# Altium PCB cando_pro_set.PcbDoc (part 2 of 3)
Units mm, origin at the board's own origin, x right, y up, seen from the top; angles counter-clockwise.
Board outline 91.6 x 86.4 mm, 2 copper layers (Top Layer, Bottom Layer); 320 components, 25 nets, 1260 pads, 588 vias.
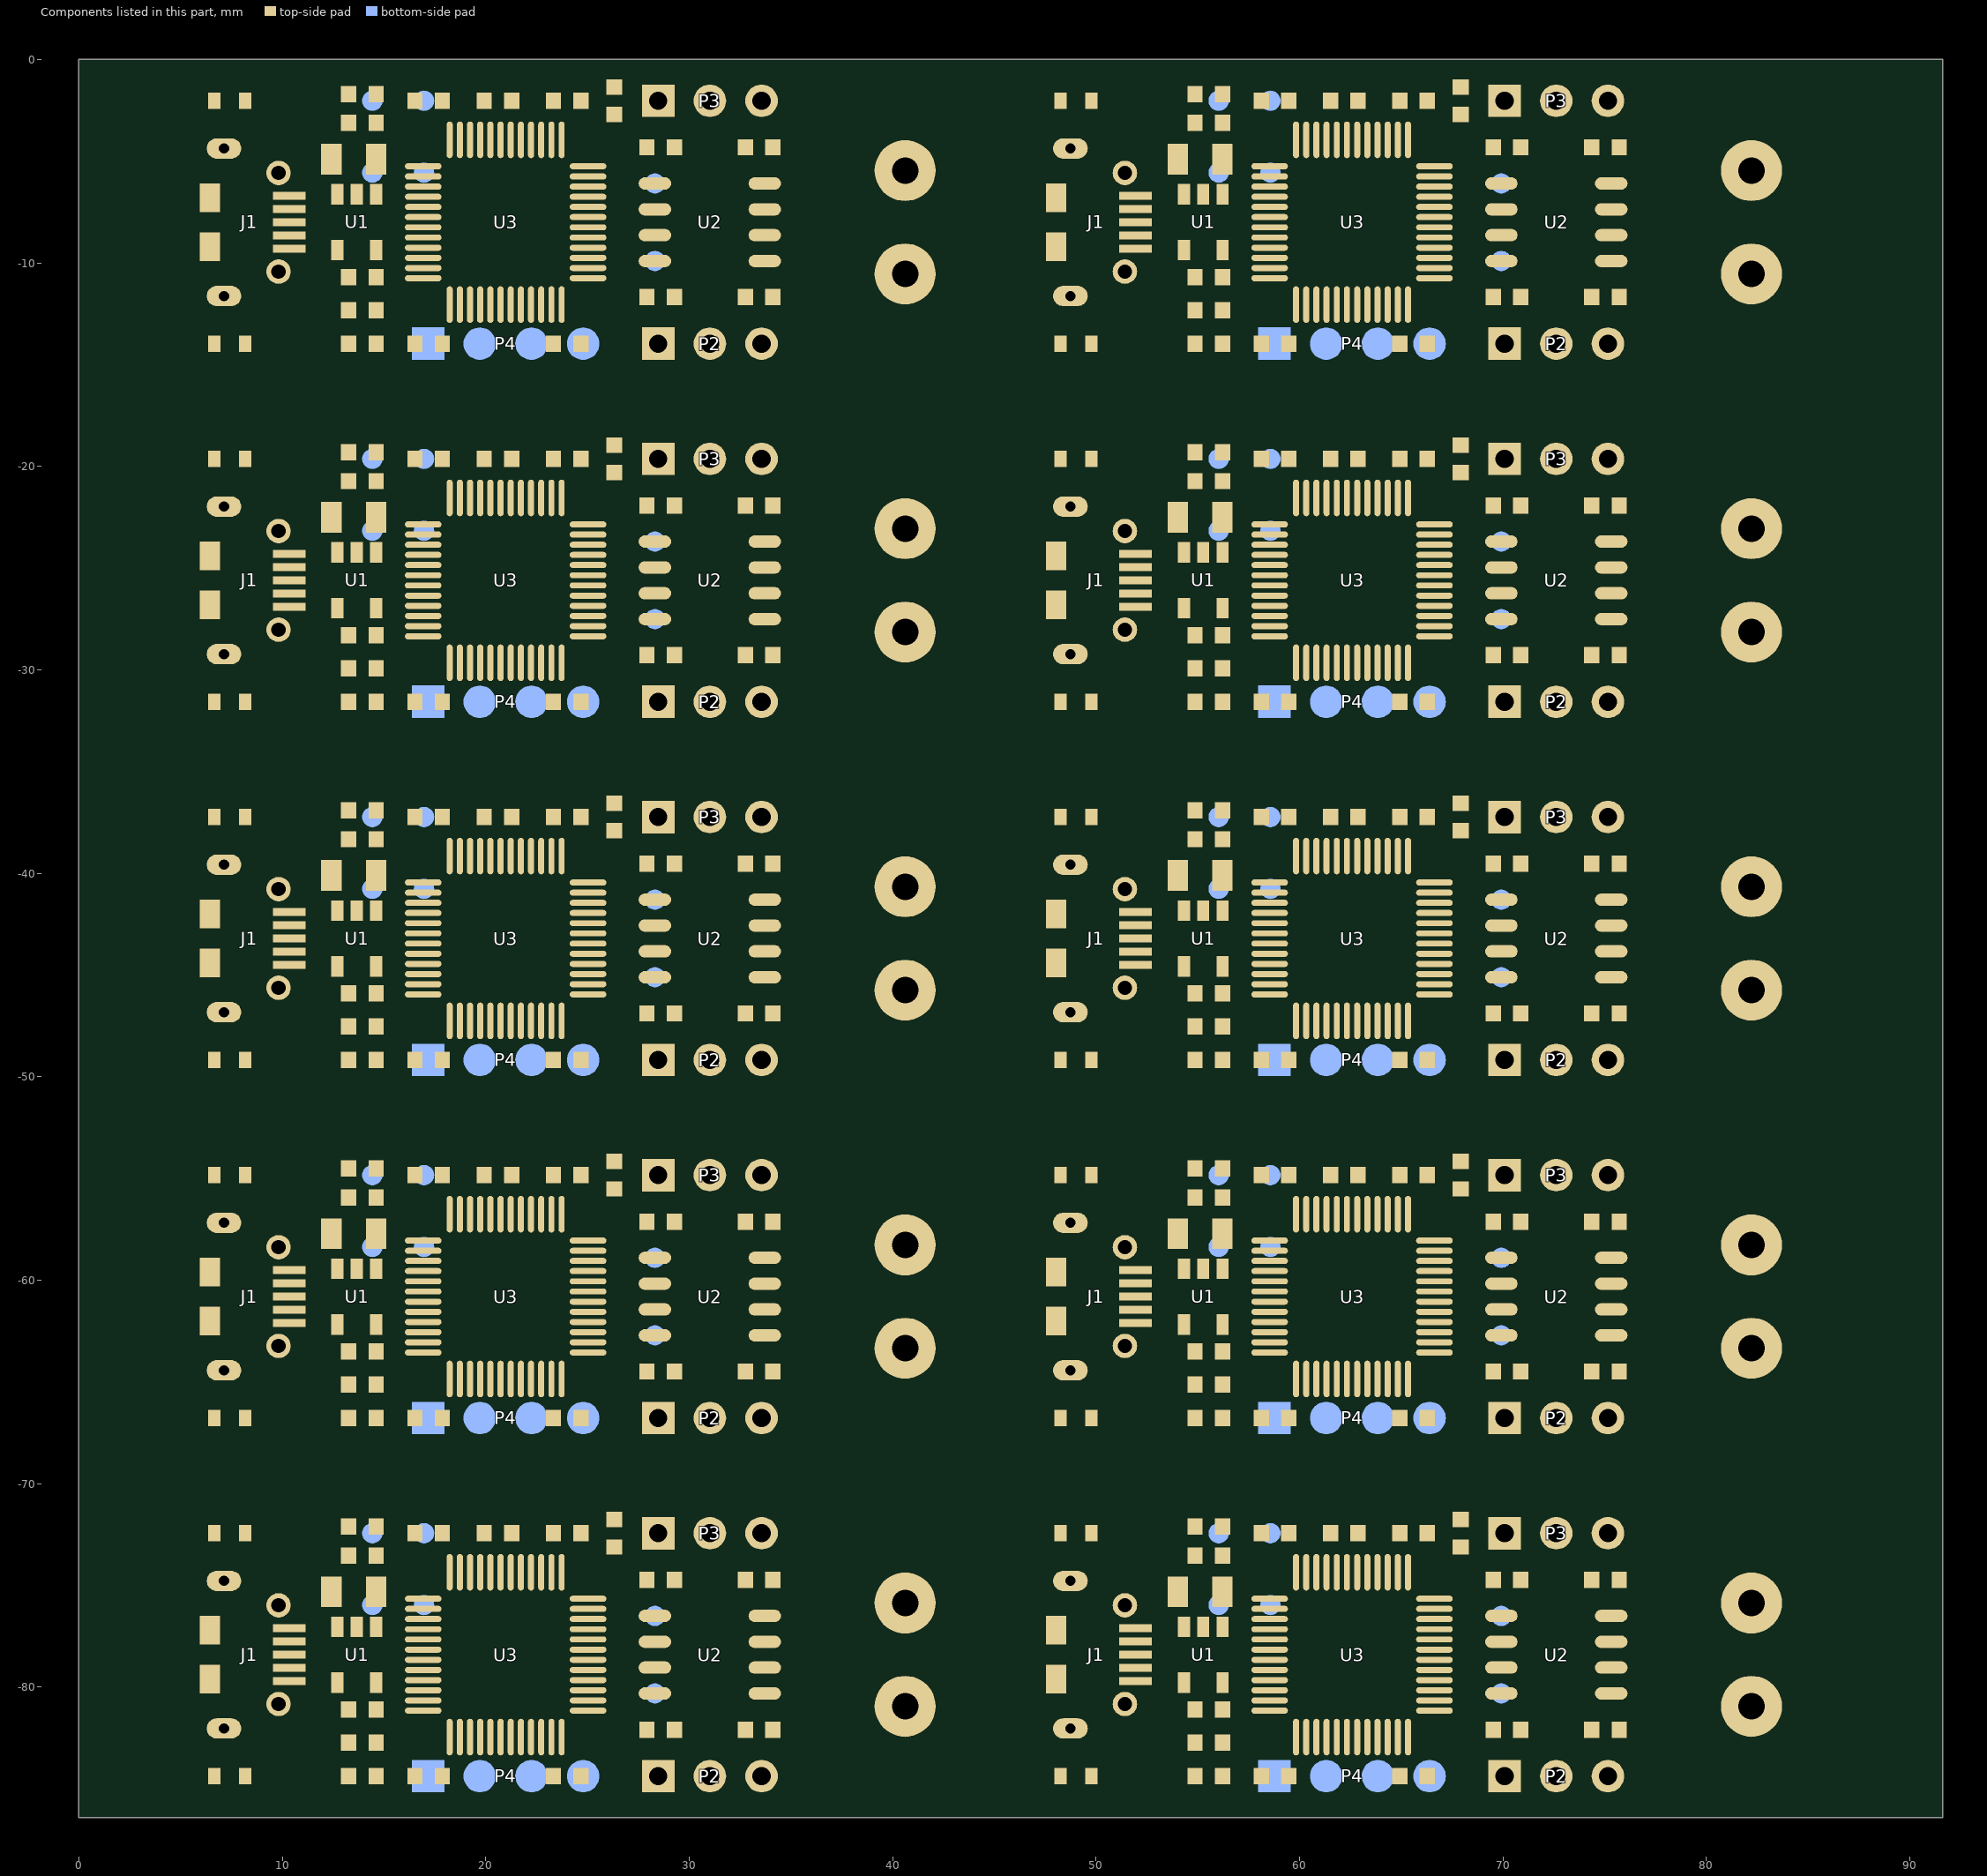
[diagram p2: the components of this part, seen from the top]

## Via types
v1: diameter 0.61, hole 0.305, Top Layer to Bottom Layer, tented both sides, 380 vias
v2: diameter 0.55, hole 0.55, Top Layer to Bottom Layer, 208 vias

## Nets (pads, with @x,y where several pads share a name; then routed paths per layer and width w, separated by ;. In a path a pad name is that pad's centre, name@x,y a point inside that pad or via, vN(x,y) a via of type N, cw(c..) or ccw(c..) an arc to the next point about the centre after c; other vN are vias at no path point) (continued)
copper on no net: | length 2947.5
  Top Layer w0.254: 6.653,-84.369 7.669,-85.385 8.811,-85.385 9.319,-84.877 10.587,-84.877 11.095,-85.385 18.919,-85.385 20.227,-84.078 20.227,-82.45 ; 6.653,-66.769 7.669,-67.785 8.811,-67.785 9.319,-67.277 10.587,-67.277 11.095,-67.785 18.919,-67.785 20.227,-66.478 20.227,-64.85 ; 6.653,-49.169 7.669,-50.185 8.811,-50.185 9.319,-49.677 10.587,-49.677 11.095,-50.185 18.919,-50.185 20.227,-48.878 20.227,-47.25 ; 6.653,-31.569 7.669,-32.585 8.811,-32.585 9.319,-32.077 10.587,-32.077 11.095,-32.585 18.919,-32.585 20.227,-31.278 20.227,-29.65 ; 6.653,-13.969 7.669,-14.985 8.811,-14.985 9.319,-14.477 10.587,-14.477 11.095,-14.985 18.919,-14.985 20.227,-13.678 20.227,-12.05 ; 8.173,-84.369 13.261,-84.369 ; 8.173,-72.431 12.931,-72.431 13.261,-72.101 ; 8.173,-66.769 13.261,-66.769 ; 8.173,-54.831 12.931,-54.831 13.261,-54.501 ; 8.173,-49.169 13.261,-49.169 ; 8.173,-37.231 12.931,-37.231 13.261,-36.901 ; 8.173,-31.569 13.261,-31.569 ; 8.173,-19.631 12.931,-19.631 13.261,-19.301 ; 8.173,-13.969 13.261,-13.969 ; 8.173,-2.031 12.931,-2.031 13.261,-1.701 ; 10.334,-78.4 12.369,-78.4 v1(12.645,-78.676) ; 10.334,-77.75 v1(11.719,-77.75) ; 10.334,-60.8 12.369,-60.8 v1(12.645,-61.076) ; 10.334,-60.15 v1(11.719,-60.15) ; 10.334,-43.2 12.369,-43.2 v1(12.645,-43.476) ; 10.334,-42.55 v1(11.719,-42.55) ; 10.334,-25.6 12.369,-25.6 v1(12.645,-25.876) ; 10.334,-24.95 v1(11.719,-24.95) ; 10.334,-8 12.369,-8 v1(12.645,-8.276) ; 10.334,-7.35 v1(11.719,-7.35) ; 12.711,-79.775 12.163,-80.324 12.163,-81.632 13.261,-82.731 ; 12.711,-62.175 12.163,-62.724 12.163,-64.032 13.261,-65.131 ; 12.711,-44.575 12.163,-45.124 12.163,-46.432 13.261,-47.531 ; 12.711,-26.975 12.163,-27.524 12.163,-28.832 13.261,-29.931 ; 12.711,-9.375 12.163,-9.924 12.163,-11.232 13.261,-12.331 ; 14.611,-84.369 16.517,-84.369 ; 14.611,-72.101 14.881,-72.101 16.024,-73.244 17.054,-73.244 17.867,-72.431 18.719,-72.431 19.727,-73.438 19.727,-74.35 19.727,-76.33 v1(22.431,-79.035) ; 14.611,-66.769 16.517,-66.769 ; 14.611,-54.501 14.881,-54.501 16.024,-55.644 17.054,-55.644 17.867,-54.831 18.719,-54.831 19.727,-55.838 19.727,-56.75 19.727,-58.73 v1(22.431,-61.435) ; 14.611,-49.169 16.517,-49.169 ; 14.611,-36.901 14.881,-36.901 16.024,-38.044 17.054,-38.044 17.867,-37.231 18.719,-37.231 19.727,-38.238 19.727,-39.15 19.727,-41.13 v1(22.431,-43.835) ; 14.611,-31.569 16.517,-31.569 ; 14.611,-19.301 14.881,-19.301 16.024,-20.444 17.054,-20.444 17.867,-19.631 18.719,-19.631 19.727,-20.638 19.727,-21.55 19.727,-23.53 v1(22.431,-26.235) ; 14.611,-13.969 16.517,-13.969 ; 14.611,-1.701 14.881,-1.701 16.024,-2.844 17.054,-2.844 17.867,-2.031 18.719,-2.031 19.727,-3.038 19.727,-3.95 19.727,-5.93 v1(22.431,-8.635) ; v1(16.517,-82.998) 16.517,-81.56 16.927,-81.15 ; v1(16.517,-65.398) 16.517,-63.96 16.927,-63.55 ; v1(16.517,-47.798) 16.517,-46.36 16.927,-45.95 ; v1(16.517,-30.198) 16.517,-28.76 16.927,-28.35 ; v1(16.517,-12.598) 16.517,-11.16 16.927,-10.75 ; v1(16.582,-73.904) 16.927,-74.248 16.927,-75.65 ; v1(16.582,-56.304) 16.927,-56.648 16.927,-58.05 ; v1(16.582,-38.704) 16.927,-39.048 16.927,-40.45 ; v1(16.582,-21.104) 16.927,-21.448 16.927,-22.85 ; v1(16.582,-3.504) 16.927,-3.848 16.927,-5.25 ; 16.927,-80.65 18.625,-80.65 v1(18.716,-80.559) ; 16.927,-76.15 17.924,-76.15 v1(18.727,-76.952) ; 16.927,-63.05 18.625,-63.05 v1(18.716,-62.959) ; 16.927,-58.55 17.924,-58.55 v1(18.727,-59.352) ; 16.927,-45.45 18.625,-45.45 v1(18.716,-45.359) ; 16.927,-40.95 17.924,-40.95 v1(18.727,-41.752) ; 16.927,-27.85 18.625,-27.85 v1(18.716,-27.759) ; 16.927,-23.35 17.924,-23.35 v1(18.727,-24.152) ; 16.927,-10.25 18.625,-10.25 v1(18.716,-10.159) ; 16.927,-5.75 17.924,-5.75 v1(18.727,-6.552) ; v1(17.243,-82.032) v1@17.243,-82.007 ; v1(17.243,-64.432) v1@17.243,-64.407 ; v1(17.243,-46.832) v1@17.243,-46.807 ; v1(17.243,-29.232) v1@17.243,-29.207 ; v1(17.243,-11.632) v1@17.243,-11.607 ; v1(17.548,-73.904) 17.781,-73.904 18.227,-74.35 ; v1(17.548,-56.304) 17.781,-56.304 18.227,-56.75 ; v1(17.548,-38.704) 17.781,-38.704 18.227,-39.15 ; v1(17.548,-21.104) 17.781,-21.104 18.227,-21.55 ; v1(17.548,-3.504) 17.781,-3.504 18.227,-3.95 ; v1(18.727,-75.962) 18.727,-74.35 ; v1(18.727,-58.362) 18.727,-56.75 ; v1(18.727,-40.762) 18.727,-39.15 ; v1(18.727,-23.162) 18.727,-21.55 ; v1(18.727,-5.562) 18.727,-3.95 ; v1(18.818,-78.679) 19.979,-78.679 19.983,-78.676 22.227,-80.92 22.227,-82.45 ; v1(18.818,-61.079) 19.979,-61.079 19.983,-61.076 22.227,-63.32 22.227,-64.85 ; v1(18.818,-43.479) 19.979,-43.479 19.983,-43.476 22.227,-45.72 22.227,-47.25 ; v1(18.818,-25.879) 19.979,-25.879 19.983,-25.876 22.227,-28.12 22.227,-29.65 ; v1(18.818,-8.279) 19.979,-8.279 19.983,-8.276 22.227,-10.52 22.227,-12.05 ; v1(19.681,-79.441) 21.727,-81.487 21.727,-82.45 ; v1(19.681,-61.841) 21.727,-63.887 21.727,-64.85 ; v1(19.681,-44.241) 21.727,-46.287 21.727,-47.25 ; v1(19.681,-26.641) 21.727,-28.687 21.727,-29.65 ; v1(19.681,-9.041) 21.727,-11.087 21.727,-12.05 ; 19.921,-72.431 20.227,-72.737 20.227,-74.35 20.227,-75.593 v1(21.637,-77.003) ; 19.921,-54.831 20.227,-55.137 20.227,-56.75 20.227,-57.993 v1(21.637,-59.403) ; 19.921,-37.231 20.227,-37.537 20.227,-39.15 20.227,-40.393 v1(21.637,-41.803) ; 19.921,-19.631 20.227,-19.937 20.227,-21.55 20.227,-22.793 v1(21.637,-24.203) ; 19.921,-2.031 20.227,-2.337 20.227,-3.95 20.227,-5.193 v1(21.637,-6.603) ; 20.727,-74.35 20.727,-72.975 21.271,-72.431 ; 20.727,-56.75 20.727,-55.375 21.271,-54.831 ; 20.727,-39.15 20.727,-37.775 21.271,-37.231 ; 20.727,-21.55 20.727,-20.175 21.271,-19.631 ; 20.727,-3.95 20.727,-2.575 21.271,-2.031 ; 22.727,-82.45 22.727,-80.761 v1(22.907,-80.581) ; 22.727,-64.85 22.727,-63.161 v1(22.907,-62.981) ; 22.727,-47.25 22.727,-45.561 v1(22.907,-45.381) ; 22.727,-29.65 22.727,-27.961 v1(22.907,-27.781) ; 22.727,-12.05 22.727,-10.361 v1(22.907,-10.181) ; v1(23.136,-77.892) v1(23.136,-76.556) 23.542,-76.15 25.027,-76.15 ; v1(23.136,-60.292) v1(23.136,-58.956) 23.542,-58.55 25.027,-58.55 ; v1(23.136,-42.692) v1(23.136,-41.356) 23.542,-40.95 25.027,-40.95 ; v1(23.136,-25.092) v1(23.136,-23.756) 23.542,-23.35 25.027,-23.35 ; v1(23.136,-7.492) v1(23.136,-6.156) 23.542,-5.75 25.027,-5.75 ; 23.227,-82.45 23.227,-84.271 23.325,-84.369 ; 23.227,-64.85 23.227,-66.671 23.325,-66.769 ; 23.227,-47.25 23.227,-49.071 23.325,-49.169 ; 23.227,-29.65 23.227,-31.471 23.325,-31.569 ; 23.227,-12.05 23.227,-13.871 23.325,-13.969 ; 23.325,-72.431 23.727,-72.833 23.727,-74.35 25.027,-75.65 22.965,-75.65 22.431,-76.183 v1(22.431,-79.035) ; 23.325,-54.831 23.727,-55.233 23.727,-56.75 25.027,-58.05 22.965,-58.05 22.431,-58.583 v1(22.431,-61.435) ; 23.325,-37.231 23.727,-37.633 23.727,-39.15 25.027,-40.45 22.965,-40.45 22.431,-40.983 v1(22.431,-43.835) ; 23.325,-19.631 23.727,-20.033 23.727,-21.55 25.027,-22.85 22.965,-22.85 22.431,-23.383 v1(22.431,-26.235) ; 23.325,-2.031 23.727,-2.433 23.727,-3.95 25.027,-5.25 22.965,-5.25 22.431,-5.783 v1(22.431,-8.635) ; 24.675,-84.369 23.727,-83.421 23.727,-82.45 23.727,-80.33 v1(22.431,-79.035) ; 24.675,-66.769 23.727,-65.821 23.727,-64.85 23.727,-62.73 v1(22.431,-61.435) ; 24.675,-49.169 23.727,-48.221 23.727,-47.25 23.727,-45.13 v1(22.431,-43.835) ; 24.675,-31.569 23.727,-30.621 23.727,-29.65 23.727,-27.53 v1(22.431,-26.235) ; 24.675,-13.969 23.727,-13.021 23.727,-12.05 23.727,-9.93 v1(22.431,-8.635) ; 25.027,-81.15 26.087,-82.21 v1(26.107,-82.21) ; 25.027,-80.65 26.325,-80.65 26.742,-81.067 30.273,-81.067 30.69,-80.65 30.69,-78.77 32.965,-76.495 33.715,-76.495 32.758,-75.538 32.758,-74.717 ; 25.027,-77.65 26.323,-77.65 v1(26.514,-77.841) ; 25.027,-77.15 26.889,-77.15 27.149,-77.409 27.149,-79.717 27.736,-80.305 28.315,-80.305 v1(29.816,-80.305) ; 25.027,-76.65 28.16,-76.65 28.315,-76.495 v1(29.816,-76.495) ; 25.027,-63.55 26.087,-64.61 v1(26.107,-64.61) ; 25.027,-63.05 26.325,-63.05 26.742,-63.467 30.273,-63.467 30.69,-63.05 30.69,-61.17 32.965,-58.895 33.715,-58.895 32.758,-57.938 32.758,-57.117 ; 25.027,-60.05 26.323,-60.05 v1(26.514,-60.241) ; 25.027,-59.55 26.889,-59.55 27.149,-59.809 27.149,-62.117 27.736,-62.705 28.315,-62.705 v1(29.816,-62.705) ; 25.027,-59.05 28.16,-59.05 28.315,-58.895 v1(29.816,-58.895) ; 25.027,-45.95 26.087,-47.01 v1(26.107,-47.01) ; 25.027,-45.45 26.325,-45.45 26.742,-45.867 30.273,-45.867 30.69,-45.45 30.69,-43.57 32.965,-41.295 33.715,-41.295 32.758,-40.338 32.758,-39.517 ; 25.027,-42.45 26.323,-42.45 v1(26.514,-42.641) ; 25.027,-41.95 26.889,-41.95 27.149,-42.209 27.149,-44.517 27.736,-45.105 28.315,-45.105 v1(29.816,-45.105) ; 25.027,-41.45 28.16,-41.45 28.315,-41.295 v1(29.816,-41.295) ; 25.027,-28.35 26.087,-29.41 v1(26.107,-29.41) ; 25.027,-27.85 26.325,-27.85 26.742,-28.267 30.273,-28.267 30.69,-27.85 30.69,-25.97 32.965,-23.695 33.715,-23.695 32.758,-22.738 32.758,-21.917 ; 25.027,-24.85 26.323,-24.85 v1(26.514,-25.041) ; 25.027,-24.35 26.889,-24.35 27.149,-24.609 27.149,-26.917 27.736,-27.505 28.315,-27.505 v1(29.816,-27.505) ; 25.027,-23.85 28.16,-23.85 28.315,-23.695 v1(29.816,-23.695) ; 25.027,-10.75 26.087,-11.81 v1(26.107,-11.81) ; 25.027,-10.25 26.325,-10.25 26.742,-10.667 30.273,-10.667 30.69,-10.25 30.69,-8.37 32.965,-6.095 33.715,-6.095 32.758,-5.138 32.758,-4.317 ; 25.027,-7.25 26.323,-7.25 v1(26.514,-7.441) ; 25.027,-6.75 26.889,-6.75 27.149,-7.009 27.149,-9.317 27.736,-9.905 28.315,-9.905 v1(29.816,-9.905) ; 25.027,-6.25 28.16,-6.25 28.315,-6.095 v1(29.816,-6.095) ; 26.316,-73.106 26.514,-73.304 v1(26.514,-75.86) ; 26.316,-71.756 26.889,-71.183 29.766,-71.183 31.015,-72.431 ; 26.316,-55.506 26.514,-55.704 v1(26.514,-58.26) ; 26.316,-54.156 26.889,-53.583 29.766,-53.583 31.015,-54.831 ; 26.316,-37.906 26.514,-38.104 v1(26.514,-40.66) ; 26.316,-36.556 26.889,-35.983 29.766,-35.983 31.015,-37.231 ; 26.316,-20.306 26.514,-20.504 v1(26.514,-23.06) ; 26.316,-18.956 26.889,-18.383 29.766,-18.383 31.015,-19.631 ; 26.316,-2.706 26.514,-2.904 v1(26.514,-5.46) ; 26.316,-1.356 26.889,-0.783 29.766,-0.783 31.015,-2.031 ; 29.272,-82.083 30.806,-82.083 32.584,-80.305 33.245,-80.305 ; 29.272,-64.483 30.806,-64.483 32.584,-62.705 33.245,-62.705 ; 29.272,-46.883 30.806,-46.883 32.584,-45.105 33.245,-45.105 ; 29.272,-29.283 30.806,-29.283 32.584,-27.505 33.245,-27.505 ; 29.272,-11.683 30.806,-11.683 32.584,-9.905 33.245,-9.905 ; 33.555,-72.431 34.108,-72.984 34.108,-74.717 34.108,-75.097 34.997,-75.987 34.997,-76.876 34.743,-77.13 32.965,-77.13 31.975,-78.121 v1(31.975,-79.035) 33.245,-80.305 ; 33.555,-54.831 34.108,-55.384 34.108,-57.117 34.108,-57.497 34.997,-58.387 34.997,-59.276 34.743,-59.53 32.965,-59.53 31.975,-60.521 v1(31.975,-61.435) 33.245,-62.705 ; 33.555,-37.231 34.108,-37.784 34.108,-39.517 34.108,-39.897 34.997,-40.787 34.997,-41.676 34.743,-41.93 32.965,-41.93 31.975,-42.921 v1(31.975,-43.835) 33.245,-45.105 ; 33.555,-19.631 34.108,-20.184 34.108,-21.917 34.108,-22.297 34.997,-23.187 34.997,-24.076 34.743,-24.33 32.965,-24.33 31.975,-25.321 v1(31.975,-26.235) 33.245,-27.505 ; 33.555,-2.031 34.108,-2.584 34.108,-4.317 34.108,-4.697 34.997,-5.587 34.997,-6.476 34.743,-6.73 32.965,-6.73 31.975,-7.721 v1(31.975,-8.635) 33.245,-9.905 ; 33.715,-80.305 33.245,-80.305 ; 33.715,-62.705 33.245,-62.705 ; 33.715,-45.105 33.245,-45.105 ; 33.715,-27.505 33.245,-27.505 ; 33.715,-9.905 33.245,-9.905 ; 48.253,-84.369 49.269,-85.385 50.411,-85.385 50.919,-84.877 52.187,-84.877 52.695,-85.385 60.519,-85.385 61.827,-84.078 61.827,-82.45 ; 48.253,-66.769 49.269,-67.785 50.411,-67.785 50.919,-67.277 52.187,-67.277 52.695,-67.785 60.519,-67.785 61.827,-66.478 61.827,-64.85 ; 48.253,-49.169 49.269,-50.185 50.411,-50.185 50.919,-49.677 52.187,-49.677 52.695,-50.185 60.519,-50.185 61.827,-48.878 61.827,-47.25 ; 48.253,-31.569 49.269,-32.585 50.411,-32.585 50.919,-32.077 52.187,-32.077 52.695,-32.585 60.519,-32.585 61.827,-31.278 61.827,-29.65 ; 48.253,-13.969 49.269,-14.985 50.411,-14.985 50.919,-14.477 52.187,-14.477 52.695,-14.985 60.519,-14.985 61.827,-13.678 61.827,-12.05 ; 49.773,-84.369 54.861,-84.369 ; 49.773,-72.431 54.531,-72.431 54.861,-72.101 ; 49.773,-66.769 54.861,-66.769 ; 49.773,-54.831 54.531,-54.831 54.861,-54.501 ; 49.773,-49.169 54.861,-49.169 ; 49.773,-37.231 54.531,-37.231 54.861,-36.901 ; 49.773,-31.569 54.861,-31.569 ; 49.773,-19.631 54.531,-19.631 54.861,-19.301 ; 49.773,-13.969 54.861,-13.969 ; 49.773,-2.031 54.531,-2.031 54.861,-1.701 ; 51.934,-78.4 53.969,-78.4 v1(54.245,-78.676) ; 51.934,-77.75 v1(53.319,-77.75) ; 51.934,-60.8 53.969,-60.8 v1(54.245,-61.076) ; 51.934,-60.15 v1(53.319,-60.15) ; 51.934,-43.2 53.969,-43.2 v1(54.245,-43.476) ; 51.934,-42.55 v1(53.319,-42.55) ; 51.934,-25.6 53.969,-25.6 v1(54.245,-25.876) ; 51.934,-24.95 v1(53.319,-24.95) ; 51.934,-8 53.969,-8 v1(54.245,-8.276) ; 51.934,-7.35 v1(53.319,-7.35) ; 54.311,-79.775 53.763,-80.324 53.763,-81.632 54.861,-82.731 ; 54.311,-62.175 53.763,-62.724 53.763,-64.032 54.861,-65.131 ; 54.311,-44.575 53.763,-45.124 53.763,-46.432 54.861,-47.531 ; 54.311,-26.975 53.763,-27.524 53.763,-28.832 54.861,-29.931 ; 54.311,-9.375 53.763,-9.924 53.763,-11.232 54.861,-12.331 ; 56.211,-84.369 58.117,-84.369 ; 56.211,-72.101 56.481,-72.101 57.624,-73.244 58.654,-73.244 59.467,-72.431 60.319,-72.431 61.327,-73.438 61.327,-74.35 61.327,-76.33 v1(64.031,-79.035) ; 56.211,-66.769 58.117,-66.769 ; 56.211,-54.501 56.481,-54.501 57.624,-55.644 58.654,-55.644 59.467,-54.831 60.319,-54.831 61.327,-55.838 61.327,-56.75 61.327,-58.73 v1(64.031,-61.435) ; 56.211,-49.169 58.117,-49.169 ; 56.211,-36.901 56.481,-36.901 57.624,-38.044 58.654,-38.044 59.467,-37.231 60.319,-37.231 61.327,-38.238 61.327,-39.15 61.327,-41.13 v1(64.031,-43.835) ; 56.211,-31.569 58.117,-31.569 ; 56.211,-19.301 56.481,-19.301 57.624,-20.444 58.654,-20.444 59.467,-19.631 60.319,-19.631 61.327,-20.638 61.327,-21.55 61.327,-23.53 v1(64.031,-26.235) ; 56.211,-13.969 58.117,-13.969 ; 56.211,-1.701 56.481,-1.701 57.624,-2.844 58.654,-2.844 59.467,-2.031 60.319,-2.031 61.327,-3.038 61.327,-3.95 61.327,-5.93 v1(64.031,-8.635) ; v1(58.117,-82.998) 58.117,-81.56 58.527,-81.15 ; v1(58.117,-65.398) 58.117,-63.96 58.527,-63.55 ; v1(58.117,-47.798) 58.117,-46.36 58.527,-45.95 ; v1(58.117,-30.198) 58.117,-28.76 58.527,-28.35 ; v1(58.117,-12.598) 58.117,-11.16 58.527,-10.75 ; v1(58.182,-73.904) 58.527,-74.248 58.527,-75.65 ; v1(58.182,-56.304) 58.527,-56.648 58.527,-58.05 ; v1(58.182,-38.704) 58.527,-39.048 58.527,-40.45 ; v1(58.182,-21.104) 58.527,-21.448 58.527,-22.85 ; v1(58.182,-3.504) 58.527,-3.848 58.527,-5.25 ; 58.527,-80.65 60.225,-80.65 v1(60.316,-80.559) ; 58.527,-76.15 59.524,-76.15 v1(60.327,-76.952) ; 58.527,-63.05 60.225,-63.05 v1(60.316,-62.959) ; 58.527,-58.55 59.524,-58.55 v1(60.327,-59.352) ; 58.527,-45.45 60.225,-45.45 v1(60.316,-45.359) ; 58.527,-40.95 59.524,-40.95 v1(60.327,-41.752) ; 58.527,-27.85 60.225,-27.85 v1(60.316,-27.759) ; 58.527,-23.35 59.524,-23.35 v1(60.327,-24.152) ; 58.527,-10.25 60.225,-10.25 v1(60.316,-10.159) ; 58.527,-5.75 59.524,-5.75 v1(60.327,-6.552) ; v1(58.843,-82.032) v1@58.843,-82.007 ; v1(58.843,-64.432) v1@58.843,-64.407 ; v1(58.843,-46.832) v1@58.843,-46.807 ; v1(58.843,-29.232) v1@58.843,-29.207 ; v1(58.843,-11.632) v1@58.843,-11.607 ; v1(59.148,-73.904) 59.381,-73.904 59.827,-74.35 ; v1(59.148,-56.304) 59.381,-56.304 59.827,-56.75 ; v1(59.148,-38.704) 59.381,-38.704 59.827,-39.15 ; v1(59.148,-21.104) 59.381,-21.104 59.827,-21.55 ; v1(59.148,-3.504) 59.381,-3.504 59.827,-3.95 ; v1(60.327,-75.962) 60.327,-74.35 ; v1(60.327,-58.362) 60.327,-56.75 ; v1(60.327,-40.762) 60.327,-39.15 ; v1(60.327,-23.162) 60.327,-21.55 ; v1(60.327,-5.562) 60.327,-3.95 ; v1(60.418,-78.679) 61.579,-78.679 61.583,-78.676 63.827,-80.92 63.827,-82.45 ; v1(60.418,-61.079) 61.579,-61.079 61.583,-61.076 63.827,-63.32 63.827,-64.85 ; v1(60.418,-43.479) 61.579,-43.479 61.583,-43.476 63.827,-45.72 63.827,-47.25 ; v1(60.418,-25.879) 61.579,-25.879 61.583,-25.876 63.827,-28.12 63.827,-29.65 ; v1(60.418,-8.279) 61.579,-8.279 61.583,-8.276 63.827,-10.52 63.827,-12.05 ; v1(61.281,-79.441) 63.327,-81.487 63.327,-82.45 ; v1(61.281,-61.841) 63.327,-63.887 63.327,-64.85 ; v1(61.281,-44.241) 63.327,-46.287 63.327,-47.25 ; v1(61.281,-26.641) 63.327,-28.687 63.327,-29.65 ; v1(61.281,-9.041) 63.327,-11.087 63.327,-12.05 ; 61.521,-72.431 61.827,-72.737 61.827,-74.35 61.827,-75.593 v1(63.237,-77.003) ; 61.521,-54.831 61.827,-55.137 61.827,-56.75 61.827,-57.993 v1(63.237,-59.403) ; 61.521,-37.231 61.827,-37.537 61.827,-39.15 61.827,-40.393 v1(63.237,-41.803) ; 61.521,-19.631 61.827,-19.937 61.827,-21.55 61.827,-22.793 v1(63.237,-24.203) ; 61.521,-2.031 61.827,-2.337 61.827,-3.95 61.827,-5.193 v1(63.237,-6.603) ; 62.327,-74.35 62.327,-72.975 62.871,-72.431 ; 62.327,-56.75 62.327,-55.375 62.871,-54.831 ; 62.327,-39.15 62.327,-37.775 62.871,-37.231 ; 62.327,-21.55 62.327,-20.175 62.871,-19.631 ; 62.327,-3.95 62.327,-2.575 62.871,-2.031 ; 64.327,-82.45 64.327,-80.761 v1(64.507,-80.581) ; 64.327,-64.85 64.327,-63.161 v1(64.507,-62.981) ; 64.327,-47.25 64.327,-45.561 v1(64.507,-45.381) ; 64.327,-29.65 64.327,-27.961 v1(64.507,-27.781) ; 64.327,-12.05 64.327,-10.361 v1(64.507,-10.181) ; v1(64.736,-77.892) v1(64.736,-76.556) 65.142,-76.15 66.627,-76.15 ; v1(64.736,-60.292) v1(64.736,-58.956) 65.142,-58.55 66.627,-58.55 ; v1(64.736,-42.692) v1(64.736,-41.356) 65.142,-40.95 66.627,-40.95 ; v1(64.736,-25.092) v1(64.736,-23.756) 65.142,-23.35 66.627,-23.35 ; v1(64.736,-7.492) v1(64.736,-6.156) 65.142,-5.75 66.627,-5.75 ; 64.827,-82.45 64.827,-84.271 64.925,-84.369 ; 64.827,-64.85 64.827,-66.671 64.925,-66.769 ; 64.827,-47.25 64.827,-49.071 64.925,-49.169 ; 64.827,-29.65 64.827,-31.471 64.925,-31.569 ; 64.827,-12.05 64.827,-13.871 64.925,-13.969 ; 64.925,-72.431 65.327,-72.833 65.327,-74.35 66.627,-75.65 64.565,-75.65 64.031,-76.183 v1(64.031,-79.035) ; 64.925,-54.831 65.327,-55.233 65.327,-56.75 66.627,-58.05 64.565,-58.05 64.031,-58.583 v1(64.031,-61.435) ; 64.925,-37.231 65.327,-37.633 65.327,-39.15 66.627,-40.45 64.565,-40.45 64.031,-40.983 v1(64.031,-43.835) ; 64.925,-19.631 65.327,-20.033 65.327,-21.55 66.627,-22.85 64.565,-22.85 64.031,-23.383 v1(64.031,-26.235) ; 64.925,-2.031 65.327,-2.433 65.327,-3.95 66.627,-5.25 64.565,-5.25 64.031,-5.783 v1(64.031,-8.635) ; 66.275,-84.369 65.327,-83.421 65.327,-82.45 65.327,-80.33 v1(64.031,-79.035) ; 66.275,-66.769 65.327,-65.821 65.327,-64.85 65.327,-62.73 v1(64.031,-61.435) ; 66.275,-49.169 65.327,-48.221 65.327,-47.25 65.327,-45.13 v1(64.031,-43.835) ; 66.275,-31.569 65.327,-30.621 65.327,-29.65 65.327,-27.53 v1(64.031,-26.235) ; 66.275,-13.969 65.327,-13.021 65.327,-12.05 65.327,-9.93 v1(64.031,-8.635) ; 66.627,-81.15 67.687,-82.21 v1(67.707,-82.21) ; 66.627,-80.65 67.925,-80.65 68.342,-81.067 71.873,-81.067 72.29,-80.65 72.29,-78.77 74.565,-76.495 75.315,-76.495 74.358,-75.538 74.358,-74.717 ; 66.627,-77.65 67.923,-77.65 v1(68.114,-77.841) ; 66.627,-77.15 68.489,-77.15 68.749,-77.409 68.749,-79.717 69.336,-80.305 69.915,-80.305 v1(71.416,-80.305) ; 66.627,-76.65 69.76,-76.65 69.915,-76.495 v1(71.416,-76.495) ; 66.627,-63.55 67.687,-64.61 v1(67.707,-64.61) ; 66.627,-63.05 67.925,-63.05 68.342,-63.467 71.873,-63.467 72.29,-63.05 72.29,-61.17 74.565,-58.895 75.315,-58.895 74.358,-57.938 74.358,-57.117 ; 66.627,-60.05 67.923,-60.05 v1(68.114,-60.241) ; 66.627,-59.55 68.489,-59.55 68.749,-59.809 68.749,-62.117 69.336,-62.705 69.915,-62.705 v1(71.416,-62.705) ; 66.627,-59.05 69.76,-59.05 69.915,-58.895 v1(71.416,-58.895) ; 66.627,-45.95 67.687,-47.01 v1(67.707,-47.01) ; 66.627,-45.45 67.925,-45.45 68.342,-45.867 71.873,-45.867 72.29,-45.45 72.29,-43.57 74.565,-41.295 75.315,-41.295 74.358,-40.338 74.358,-39.517 ; 66.627,-42.45 67.923,-42.45 v1(68.114,-42.641) ; 66.627,-41.95 68.489,-41.95 68.749,-42.209 68.749,-44.517 69.336,-45.105 69.915,-45.105 v1(71.416,-45.105) ; 66.627,-41.45 69.76,-41.45 69.915,-41.295 v1(71.416,-41.295) ; 66.627,-28.35 67.687,-29.41 v1(67.707,-29.41) ; 66.627,-27.85 67.925,-27.85 68.342,-28.267 71.873,-28.267 72.29,-27.85 72.29,-25.97 74.565,-23.695 75.315,-23.695 74.358,-22.738 74.358,-21.917 ; 66.627,-24.85 67.923,-24.85 v1(68.114,-25.041) ; 66.627,-24.35 68.489,-24.35 68.749,-24.609 68.749,-26.917 69.336,-27.505 69.915,-27.505 v1(71.416,-27.505) ; 66.627,-23.85 69.76,-23.85 69.915,-23.695 v1(71.416,-23.695) ; 66.627,-10.75 67.687,-11.81 v1(67.707,-11.81) ; 66.627,-10.25 67.925,-10.25 68.342,-10.667 71.873,-10.667 72.29,-10.25 72.29,-8.37 74.565,-6.095 75.315,-6.095 74.358,-5.138 74.358,-4.317 ; 66.627,-7.25 67.923,-7.25 v1(68.114,-7.441) ; 66.627,-6.75 68.489,-6.75 68.749,-7.009 68.749,-9.317 69.336,-9.905 69.915,-9.905 v1(71.416,-9.905) ; 66.627,-6.25 69.76,-6.25 69.915,-6.095 v1(71.416,-6.095) ; 67.916,-73.106 68.114,-73.304 v1(68.114,-75.86) ; 67.916,-71.756 68.489,-71.183 71.366,-71.183 72.615,-72.431 ; 67.916,-55.506 68.114,-55.704 v1(68.114,-58.26) ; 67.916,-54.156 68.489,-53.583 71.366,-53.583 72.615,-54.831 ; 67.916,-37.906 68.114,-38.104 v1(68.114,-40.66) ; 67.916,-36.556 68.489,-35.983 71.366,-35.983 72.615,-37.231 ; 67.916,-20.306 68.114,-20.504 v1(68.114,-23.06) ; 67.916,-18.956 68.489,-18.383 71.366,-18.383 72.615,-19.631 ; 67.916,-2.706 68.114,-2.904 v1(68.114,-5.46) ; 67.916,-1.356 68.489,-0.783 71.366,-0.783 72.615,-2.031 ; 70.872,-82.083 72.406,-82.083 74.184,-80.305 74.845,-80.305 ; 70.872,-64.483 72.406,-64.483 74.184,-62.705 74.845,-62.705 ; 70.872,-46.883 72.406,-46.883 74.184,-45.105 74.845,-45.105 ; 70.872,-29.283 72.406,-29.283 74.184,-27.505 74.845,-27.505 ; 70.872,-11.683 72.406,-11.683 74.184,-9.905 74.845,-9.905 ; 75.155,-72.431 75.708,-72.984 75.708,-74.717 75.708,-75.097 76.597,-75.987 76.597,-76.876 76.343,-77.13 74.565,-77.13 73.575,-78.121 v1(73.575,-79.035) 74.845,-80.305 ; 75.155,-54.831 75.708,-55.384 75.708,-57.117 75.708,-57.497 76.597,-58.387 76.597,-59.276 76.343,-59.53 74.565,-59.53 73.575,-60.521 v1(73.575,-61.435) 74.845,-62.705 ; 75.155,-37.231 75.708,-37.784 75.708,-39.517 75.708,-39.897 76.597,-40.787 76.597,-41.676 76.343,-41.93 74.565,-41.93 73.575,-42.921 v1(73.575,-43.835) 74.845,-45.105 ; 75.155,-19.631 75.708,-20.184 75.708,-21.917 75.708,-22.297 76.597,-23.187 76.597,-24.076 76.343,-24.33 74.565,-24.33 73.575,-25.321 v1(73.575,-26.235) 74.845,-27.505 ; 75.155,-2.031 75.708,-2.584 75.708,-4.317 75.708,-4.697 76.597,-5.587 76.597,-6.476 76.343,-6.73 74.565,-6.73 73.575,-7.721 v1(73.575,-8.635) 74.845,-9.905 ; 75.315,-80.305 74.845,-80.305 ; 75.315,-62.705 74.845,-62.705 ; 75.315,-45.105 74.845,-45.105 ; 75.315,-27.505 74.845,-27.505 ; 75.315,-9.905 74.845,-9.905
  Top Layer w0.508: 10.334,-77.1 12.133,-75.301 12.411,-75.301 ; 10.334,-59.5 12.133,-57.701 12.411,-57.701 ; 10.334,-41.9 12.133,-40.101 12.411,-40.101 ; 10.334,-24.3 12.133,-22.501 12.411,-22.501 ; 10.334,-6.7 12.133,-4.901 12.411,-4.901 ; 12.711,-77.025 12.711,-77.599 13.153,-78.041 14.169,-78.041 14.611,-77.599 14.611,-77.025 14.611,-75.301 ; 12.711,-59.425 12.711,-59.999 13.153,-60.441 14.169,-60.441 14.611,-59.999 14.611,-59.425 14.611,-57.701 ; 12.711,-41.825 12.711,-42.399 13.153,-42.841 14.169,-42.841 14.611,-42.399 14.611,-41.825 14.611,-40.101 ; 12.711,-24.225 12.711,-24.799 13.153,-25.241 14.169,-25.241 14.611,-24.799 14.611,-24.225 14.611,-22.501 ; 12.711,-6.625 12.711,-7.199 13.153,-7.641 14.169,-7.641 14.611,-7.199 14.611,-6.625 14.611,-4.901 ; 14.611,-79.775 14.611,-81.092 v1(16.517,-82.998) 16.517,-84.369 ; 14.611,-73.523 14.611,-75.301 ; 14.611,-62.175 14.611,-63.492 v1(16.517,-65.398) 16.517,-66.769 ; 14.611,-55.923 14.611,-57.701 ; 14.611,-44.575 14.611,-45.892 v1(16.517,-47.798) 16.517,-49.169 ; 14.611,-38.323 14.611,-40.101 ; 14.611,-26.975 14.611,-28.292 v1(16.517,-30.198) 16.517,-31.569 ; 14.611,-20.723 14.611,-22.501 ; 14.611,-9.375 14.611,-10.692 v1(16.517,-12.598) 16.517,-13.969 ; 14.611,-3.123 14.611,-4.901 ; v1(15.897,-74.717) 15.195,-74.717 14.611,-75.301 ; v1(15.897,-57.117) 15.195,-57.117 14.611,-57.701 ; v1(15.897,-39.517) 15.195,-39.517 14.611,-40.101 ; v1(15.897,-21.917) 15.195,-21.917 14.611,-22.501 ; v1(15.897,-4.317) 15.195,-4.317 14.611,-4.901 ; v1(17.243,-82.032) 17.243,-83.745 17.867,-84.369 ; v1(17.243,-64.432) 17.243,-66.145 17.867,-66.769 ; v1(17.243,-46.832) 17.243,-48.545 17.867,-49.169 ; v1(17.243,-29.232) 17.243,-30.945 17.867,-31.569 ; v1(17.243,-11.632) 17.243,-13.345 17.867,-13.969 ; 28.315,-79.035 29.558,-79.035 31.543,-77.05 31.543,-75.758 v1(30.502,-74.717) 29.272,-74.717 ; 28.315,-61.435 29.558,-61.435 31.543,-59.45 31.543,-58.158 v1(30.502,-57.117) 29.272,-57.117 ; 28.315,-43.835 29.558,-43.835 31.543,-41.85 31.543,-40.558 v1(30.502,-39.517) 29.272,-39.517 ; 28.315,-26.235 29.558,-26.235 31.543,-24.25 31.543,-22.958 v1(30.502,-21.917) 29.272,-21.917 ; 28.315,-8.635 29.558,-8.635 31.543,-6.65 31.543,-5.358 v1(30.502,-4.317) 29.272,-4.317 ; 31.015,-84.369 31.015,-83.826 32.758,-82.083 ; 31.015,-66.769 31.015,-66.226 32.758,-64.483 ; 31.015,-49.169 31.015,-48.626 32.758,-46.883 ; 31.015,-31.569 31.015,-31.026 32.758,-29.283 ; 31.015,-13.969 31.015,-13.426 32.758,-11.683 ; 33.555,-84.369 36.984,-80.94 40.611,-80.94 38.706,-79.035 33.715,-79.035 ; 33.555,-66.769 36.984,-63.34 40.611,-63.34 38.706,-61.435 33.715,-61.435 ; 33.555,-49.169 36.984,-45.74 40.611,-45.74 38.706,-43.835 33.715,-43.835 ; 33.555,-31.569 36.984,-28.14 40.611,-28.14 38.706,-26.235 33.715,-26.235 ; 33.555,-13.969 36.984,-10.54 40.611,-10.54 38.706,-8.635 33.715,-8.635 ; 33.715,-77.765 38.706,-77.765 40.611,-75.86 ; 33.715,-60.165 38.706,-60.165 40.611,-58.26 ; 33.715,-42.565 38.706,-42.565 40.611,-40.66 ; 33.715,-24.965 38.706,-24.965 40.611,-23.06 ; 33.715,-7.365 38.706,-7.365 40.611,-5.46 ; 34.108,-82.083 36.245,-79.946 v1(37.664,-79.946) ; 34.108,-64.483 36.245,-62.346 v1(37.664,-62.346) ; 34.108,-46.883 36.245,-44.746 v1(37.664,-44.746) ; 34.108,-29.283 36.245,-27.146 v1(37.664,-27.146) ; 34.108,-11.683 36.245,-9.546 v1(37.664,-9.546) ; 51.934,-77.1 53.733,-75.301 54.011,-75.301 ; 51.934,-59.5 53.733,-57.701 54.011,-57.701 ; 51.934,-41.9 53.733,-40.101 54.011,-40.101 ; 51.934,-24.3 53.733,-22.501 54.011,-22.501 ; 51.934,-6.7 53.733,-4.901 54.011,-4.901 ; 54.311,-77.025 54.311,-77.599 54.753,-78.041 55.769,-78.041 56.211,-77.599 56.211,-77.025 56.211,-75.301 ; 54.311,-59.425 54.311,-59.999 54.753,-60.441 55.769,-60.441 56.211,-59.999 56.211,-59.425 56.211,-57.701 ; 54.311,-41.825 54.311,-42.399 54.753,-42.841 55.769,-42.841 56.211,-42.399 56.211,-41.825 56.211,-40.101 ; 54.311,-24.225 54.311,-24.799 54.753,-25.241 55.769,-25.241 56.211,-24.799 56.211,-24.225 56.211,-22.501 ; 54.311,-6.625 54.311,-7.199 54.753,-7.641 55.769,-7.641 56.211,-7.199 56.211,-6.625 56.211,-4.901 ; 56.211,-79.775 56.211,-81.092 v1(58.117,-82.998) 58.117,-84.369 ; 56.211,-73.523 56.211,-75.301 ; 56.211,-62.175 56.211,-63.492 v1(58.117,-65.398) 58.117,-66.769 ; 56.211,-55.923 56.211,-57.701 ; 56.211,-44.575 56.211,-45.892 v1(58.117,-47.798) 58.117,-49.169 ; 56.211,-38.323 56.211,-40.101 ; 56.211,-26.975 56.211,-28.292 v1(58.117,-30.198) 58.117,-31.569 ; 56.211,-20.723 56.211,-22.501 ; 56.211,-9.375 56.211,-10.692 v1(58.117,-12.598) 58.117,-13.969 ; 56.211,-3.123 56.211,-4.901 ; v1(57.497,-74.717) 56.795,-74.717 56.211,-75.301 ; v1(57.497,-57.117) 56.795,-57.117 56.211,-57.701 ; v1(57.497,-39.517) 56.795,-39.517 56.211,-40.101 ; v1(57.497,-21.917) 56.795,-21.917 56.211,-22.501 ; v1(57.497,-4.317) 56.795,-4.317 56.211,-4.901 ; v1(58.843,-82.032) 58.843,-83.745 59.467,-84.369 ; v1(58.843,-64.432) 58.843,-66.145 59.467,-66.769 ; v1(58.843,-46.832) 58.843,-48.545 59.467,-49.169 ; v1(58.843,-29.232) 58.843,-30.945 59.467,-31.569 ; v1(58.843,-11.632) 58.843,-13.345 59.467,-13.969 ; 69.915,-79.035 71.158,-79.035 73.143,-77.05 73.143,-75.758 v1(72.102,-74.717) 70.872,-74.717 ; 69.915,-61.435 71.158,-61.435 73.143,-59.45 73.143,-58.158 v1(72.102,-57.117) 70.872,-57.117 ; 69.915,-43.835 71.158,-43.835 73.143,-41.85 73.143,-40.558 v1(72.102,-39.517) 70.872,-39.517 ; 69.915,-26.235 71.158,-26.235 73.143,-24.25 73.143,-22.958 v1(72.102,-21.917) 70.872,-21.917 ; 69.915,-8.635 71.158,-8.635 73.143,-6.65 73.143,-5.358 v1(72.102,-4.317) 70.872,-4.317 ; 72.615,-84.369 72.615,-83.826 74.358,-82.083 ; 72.615,-66.769 72.615,-66.226 74.358,-64.483 ; 72.615,-49.169 72.615,-48.626 74.358,-46.883 ; 72.615,-31.569 72.615,-31.026 74.358,-29.283 ; 72.615,-13.969 72.615,-13.426 74.358,-11.683 ; 75.155,-84.369 78.584,-80.94 82.211,-80.94 80.306,-79.035 75.315,-79.035 ; 75.155,-66.769 78.584,-63.34 82.211,-63.34 80.306,-61.435 75.315,-61.435 ; 75.155,-49.169 78.584,-45.74 82.211,-45.74 80.306,-43.835 75.315,-43.835 ; 75.155,-31.569 78.584,-28.14 82.211,-28.14 80.306,-26.235 75.315,-26.235 ; 75.155,-13.969 78.584,-10.54 82.211,-10.54 80.306,-8.635 75.315,-8.635 ; 75.315,-77.765 80.306,-77.765 82.211,-75.86 ; 75.315,-60.165 80.306,-60.165 82.211,-58.26 ; 75.315,-42.565 80.306,-42.565 82.211,-40.66 ; 75.315,-24.965 80.306,-24.965 82.211,-23.06 ; 75.315,-7.365 80.306,-7.365 82.211,-5.46 ; 75.708,-82.083 77.845,-79.946 v1(79.264,-79.946) ; 75.708,-64.483 77.845,-62.346 v1(79.264,-62.346) ; 75.708,-46.883 77.845,-44.746 v1(79.264,-44.746) ; 75.708,-29.283 77.845,-27.146 v1(79.264,-27.146) ; 75.708,-11.683 77.845,-9.546 v1(79.264,-9.546)
  Bottom Layer w0.254: v1(11.719,-77.75) 19.031,-77.75 19.681,-78.4 v1(19.681,-79.441) ; v1(11.719,-60.15) 19.031,-60.15 19.681,-60.8 v1(19.681,-61.841) ; v1(11.719,-42.55) 19.031,-42.55 19.681,-43.2 v1(19.681,-44.241) ; v1(11.719,-24.95) 19.031,-24.95 19.681,-25.6 v1(19.681,-26.641) ; v1(11.719,-7.35) 19.031,-7.35 19.681,-8 v1(19.681,-9.041) ; v1(12.645,-78.676) 12.921,-78.4 18.538,-78.4 v1(18.818,-78.679) ; v1(12.645,-61.076) 12.921,-60.8 18.538,-60.8 v1(18.818,-61.079) ; v1(12.645,-43.476) 12.921,-43.2 18.538,-43.2 v1(18.818,-43.479) ; v1(12.645,-25.876) 12.921,-25.6 18.538,-25.6 v1(18.818,-25.879) ; v1(12.645,-8.276) 12.921,-8 18.538,-8 v1(18.818,-8.279) ; 14.423,-75.962 15.414,-76.952 v1(18.727,-76.952) ; 14.423,-72.431 15.109,-72.431 v1(16.582,-73.904) ; 14.423,-58.362 15.414,-59.352 v1(18.727,-59.352) ; 14.423,-54.831 15.109,-54.831 v1(16.582,-56.304) ; 14.423,-40.762 15.414,-41.752 v1(18.727,-41.752) ; 14.423,-37.231 15.109,-37.231 v1(16.582,-38.704) ; 14.423,-23.162 15.414,-24.152 v1(18.727,-24.152) ; 14.423,-19.631 15.109,-19.631 v1(16.582,-21.104) ; 14.423,-5.562 15.414,-6.552 v1(18.727,-6.552) ; 14.423,-2.031 15.109,-2.031 v1(16.582,-3.504) ; 16.963,-75.962 v1(18.727,-75.962) ; 16.963,-72.431 16.963,-73.32 v1(17.548,-73.904) ; 16.963,-58.362 v1(18.727,-58.362) ; 16.963,-54.831 16.963,-55.72 v1(17.548,-56.304) ; 16.963,-40.762 v1(18.727,-40.762) ; 16.963,-37.231 16.963,-38.12 v1(17.548,-38.704) ; 16.963,-23.162 v1(18.727,-23.162) ; 16.963,-19.631 16.963,-20.52 v1(17.548,-21.104) ; 16.963,-5.562 v1(18.727,-5.562) ; 16.963,-2.031 16.963,-2.92 v1(17.548,-3.504) ; 19.707,-84.369 19.707,-83.781 v1(22.907,-80.581) ; 19.707,-66.769 19.707,-66.181 v1(22.907,-62.981) ; 19.707,-49.169 19.707,-48.581 v1(22.907,-45.381) ; 19.707,-31.569 19.707,-30.981 v1(22.907,-27.781) ; 19.707,-13.969 19.707,-13.381 v1(22.907,-10.181) ; v1(21.637,-77.003) 22.526,-77.892 v1(23.136,-77.892) ; v1(21.637,-59.403) 22.526,-60.292 v1(23.136,-60.292) ; v1(21.637,-41.803) 22.526,-42.692 v1(23.136,-42.692) ; v1(21.637,-24.203) 22.526,-25.092 v1(23.136,-25.092) ; v1(21.637,-6.603) 22.526,-7.492 v1(23.136,-7.492) ; 22.247,-84.369 24.406,-82.21 v1(26.107,-82.21) ; 22.247,-66.769 24.406,-64.61 v1(26.107,-64.61) ; 22.247,-49.169 24.406,-47.01 v1(26.107,-47.01) ; 22.247,-31.569 24.406,-29.41 v1(26.107,-29.41) ; 22.247,-13.969 24.406,-11.81 v1(26.107,-11.81) ; v1(26.514,-77.841) v1(26.514,-75.86) ; v1(26.514,-60.241) v1(26.514,-58.26) ; v1(26.514,-42.641) v1(26.514,-40.66) ; v1(26.514,-25.041) v1(26.514,-23.06) ; v1(26.514,-7.441) v1(26.514,-5.46) ; 28.315,-80.305 v1(29.816,-80.305) ; 28.315,-76.495 v1(29.816,-76.495) ; 28.315,-62.705 v1(29.816,-62.705) ; 28.315,-58.895 v1(29.816,-58.895) ; 28.315,-45.105 v1(29.816,-45.105) ; 28.315,-41.295 v1(29.816,-41.295) ; 28.315,-27.505 v1(29.816,-27.505) ; 28.315,-23.695 v1(29.816,-23.695) ; 28.315,-9.905 v1(29.816,-9.905) ; 28.315,-6.095 v1(29.816,-6.095) ; v1(53.319,-77.75) 60.631,-77.75 61.281,-78.4 v1(61.281,-79.441) ; v1(53.319,-60.15) 60.631,-60.15 61.281,-60.8 v1(61.281,-61.841) ; v1(53.319,-42.55) 60.631,-42.55 61.281,-43.2 v1(61.281,-44.241) ; v1(53.319,-24.95) 60.631,-24.95 61.281,-25.6 v1(61.281,-26.641) ; v1(53.319,-7.35) 60.631,-7.35 61.281,-8 v1(61.281,-9.041) ; v1(54.245,-78.676) 54.521,-78.4 60.138,-78.4 v1(60.418,-78.679) ; v1(54.245,-61.076) 54.521,-60.8 60.138,-60.8 v1(60.418,-61.079) ; v1(54.245,-43.476) 54.521,-43.2 60.138,-43.2 v1(60.418,-43.479) ; v1(54.245,-25.876) 54.521,-25.6 60.138,-25.6 v1(60.418,-25.879) ; v1(54.245,-8.276) 54.521,-8 60.138,-8 v1(60.418,-8.279) ; 56.023,-75.962 57.014,-76.952 v1(60.327,-76.952) ; 56.023,-72.431 56.709,-72.431 v1(58.182,-73.904) ; 56.023,-58.362 57.014,-59.352 v1(60.327,-59.352) ; 56.023,-54.831 56.709,-54.831 v1(58.182,-56.304) ; 56.023,-40.762 57.014,-41.752 v1(60.327,-41.752) ; 56.023,-37.231 56.709,-37.231 v1(58.182,-38.704) ; 56.023,-23.162 57.014,-24.152 v1(60.327,-24.152) ; 56.023,-19.631 56.709,-19.631 v1(58.182,-21.104) ; 56.023,-5.562 57.014,-6.552 v1(60.327,-6.552) ; 56.023,-2.031 56.709,-2.031 v1(58.182,-3.504) ; 58.563,-75.962 v1(60.327,-75.962) ; 58.563,-72.431 58.563,-73.32 v1(59.148,-73.904) ; 58.563,-58.362 v1(60.327,-58.362) ; 58.563,-54.831 58.563,-55.72 v1(59.148,-56.304) ; 58.563,-40.762 v1(60.327,-40.762) ; 58.563,-37.231 58.563,-38.12 v1(59.148,-38.704) ; 58.563,-23.162 v1(60.327,-23.162) ; 58.563,-19.631 58.563,-20.52 v1(59.148,-21.104) ; 58.563,-5.562 v1(60.327,-5.562) ; 58.563,-2.031 58.563,-2.92 v1(59.148,-3.504) ; 61.307,-84.369 61.307,-83.781 v1(64.507,-80.581) ; 61.307,-66.769 61.307,-66.181 v1(64.507,-62.981) ; 61.307,-49.169 61.307,-48.581 v1(64.507,-45.381) ; 61.307,-31.569 61.307,-30.981 v1(64.507,-27.781) ; 61.307,-13.969 61.307,-13.381 v1(64.507,-10.181) ; v1(63.237,-77.003) 64.126,-77.892 v1(64.736,-77.892) ; v1(63.237,-59.403) 64.126,-60.292 v1(64.736,-60.292) ; v1(63.237,-41.803) 64.126,-42.692 v1(64.736,-42.692) ; v1(63.237,-24.203) 64.126,-25.092 v1(64.736,-25.092) ; v1(63.237,-6.603) 64.126,-7.492 v1(64.736,-7.492) ; 63.847,-84.369 66.006,-82.21 v1(67.707,-82.21) ; 63.847,-66.769 66.006,-64.61 v1(67.707,-64.61) ; 63.847,-49.169 66.006,-47.01 v1(67.707,-47.01) ; 63.847,-31.569 66.006,-29.41 v1(67.707,-29.41) ; 63.847,-13.969 66.006,-11.81 v1(67.707,-11.81) ; v1(68.114,-77.841) v1(68.114,-75.86) ; v1(68.114,-60.241) v1(68.114,-58.26) ; v1(68.114,-42.641) v1(68.114,-40.66) ; v1(68.114,-25.041) v1(68.114,-23.06) ; v1(68.114,-7.441) v1(68.114,-5.46) ; 69.915,-80.305 v1(71.416,-80.305) ; 69.915,-76.495 v1(71.416,-76.495) ; 69.915,-62.705 v1(71.416,-62.705) ; 69.915,-58.895 v1(71.416,-58.895) ; 69.915,-45.105 v1(71.416,-45.105) ; 69.915,-41.295 v1(71.416,-41.295) ; 69.915,-27.505 v1(71.416,-27.505) ; 69.915,-23.695 v1(71.416,-23.695) ; 69.915,-9.905 v1(71.416,-9.905) ; 69.915,-6.095 v1(71.416,-6.095)
  Bottom Layer w0.508: v1(15.897,-74.717) v1(30.502,-74.717) ; v1(15.897,-57.117) v1(30.502,-57.117) ; v1(15.897,-39.517) v1(30.502,-39.517) ; v1(15.897,-21.917) v1(30.502,-21.917) ; v1(15.897,-4.317) v1(30.502,-4.317) ; 17.167,-84.369 17.167,-83.648 v1(16.517,-82.998) 18.436,-82.998 22.399,-79.035 v1(22.431,-79.035) v1(31.975,-79.035) ; 17.167,-66.769 17.167,-66.048 v1(16.517,-65.398) 18.436,-65.398 22.399,-61.435 v1(22.431,-61.435) v1(31.975,-61.435) ; 17.167,-49.169 17.167,-48.448 v1(16.517,-47.798) 18.436,-47.798 22.399,-43.835 v1(22.431,-43.835) v1(31.975,-43.835) ; 17.167,-31.569 17.167,-30.848 v1(16.517,-30.198) 18.436,-30.198 22.399,-26.235 v1(22.431,-26.235) v1(31.975,-26.235) ; 17.167,-13.969 17.167,-13.248 v1(16.517,-12.598) 18.436,-12.598 22.399,-8.635 v1(22.431,-8.635) v1(31.975,-8.635) ; v1(37.664,-79.946) 40.611,-76.999 40.611,-75.86 ; v1(37.664,-62.346) 40.611,-59.399 40.611,-58.26 ; v1(37.664,-44.746) 40.611,-41.799 40.611,-40.66 ; v1(37.664,-27.146) 40.611,-24.199 40.611,-23.06 ; v1(37.664,-9.546) 40.611,-6.599 40.611,-5.46 ; v1(57.497,-74.717) v1(72.102,-74.717) ; v1(57.497,-57.117) v1(72.102,-57.117) ; v1(57.497,-39.517) v1(72.102,-39.517) ; v1(57.497,-21.917) v1(72.102,-21.917) ; v1(57.497,-4.317) v1(72.102,-4.317) ; 58.767,-84.369 58.767,-83.648 v1(58.117,-82.998) 60.036,-82.998 63.999,-79.035 v1(64.031,-79.035) v1(73.575,-79.035) ; 58.767,-66.769 58.767,-66.048 v1(58.117,-65.398) 60.036,-65.398 63.999,-61.435 v1(64.031,-61.435) v1(73.575,-61.435) ; 58.767,-49.169 58.767,-48.448 v1(58.117,-47.798) 60.036,-47.798 63.999,-43.835 v1(64.031,-43.835) v1(73.575,-43.835) ; 58.767,-31.569 58.767,-30.848 v1(58.117,-30.198) 60.036,-30.198 63.999,-26.235 v1(64.031,-26.235) v1(73.575,-26.235) ; 58.767,-13.969 58.767,-13.248 v1(58.117,-12.598) 60.036,-12.598 63.999,-8.635 v1(64.031,-8.635) v1(73.575,-8.635) ; v1(79.264,-79.946) 82.211,-76.999 82.211,-75.86 ; v1(79.264,-62.346) 82.211,-59.399 82.211,-58.26 ; v1(79.264,-44.746) 82.211,-41.799 82.211,-40.66 ; v1(79.264,-27.146) 82.211,-24.199 82.211,-23.06 ; v1(79.264,-9.546) 82.211,-6.599 82.211,-5.46
  other v1: 26.615,-84.369 68.215,-84.369 9.826,-82.972 11.096,-82.972 51.426,-82.972 52.696,-82.972 37.766,-82.464 43.456,-82.464 79.366,-82.464 85.056,-82.464 19.986,-77.638 61.586,-77.638 29.816,-77.511 71.416,-77.511 37.766,-74.336 43.456,-74.336 79.366,-74.336 85.056,-74.336 9.826,-73.828 11.096,-73.828 51.426,-73.828 52.696,-73.828 18.843,-71.415 22.272,-71.415 60.443,-71.415 63.872,-71.415 26.615,-66.769 68.215,-66.769 9.826,-65.372 11.096,-65.372 51.426,-65.372 52.696,-65.372 37.766,-64.864 43.456,-64.864 79.366,-64.864 85.056,-64.864 19.986,-60.038 61.586,-60.038 29.816,-59.911 71.416,-59.911 37.766,-56.736 43.456,-56.736 79.366,-56.736 85.056,-56.736 9.826,-56.228 11.096,-56.228 51.426,-56.228 52.696,-56.228 18.843,-53.815 22.272,-53.815 60.443,-53.815 63.872,-53.815 26.615,-49.169 68.215,-49.169 9.826,-47.772 11.096,-47.772 51.426,-47.772 52.696,-47.772 37.766,-47.264 43.456,-47.264 79.366,-47.264 85.056,-47.264 19.986,-42.438 61.586,-42.438 29.816,-42.311 71.416,-42.311 37.766,-39.136 43.456,-39.136 79.366,-39.136 85.056,-39.136 9.826,-38.628 11.096,-38.628 51.426,-38.628 52.696,-38.628 18.843,-36.215 22.272,-36.215 60.443,-36.215 63.872,-36.215 26.615,-31.569 68.215,-31.569 9.826,-30.172 11.096,-30.172 51.426,-30.172 52.696,-30.172 37.766,-29.664 43.456,-29.664 79.366,-29.664 85.056,-29.664 19.986,-24.838 61.586,-24.838 29.816,-24.711 71.416,-24.711 37.766,-21.536 43.456,-21.536 79.366,-21.536 85.056,-21.536 9.826,-21.028 11.096,-21.028 51.426,-21.028 52.696,-21.028 18.843,-18.615 22.272,-18.615 60.443,-18.615 63.872,-18.615 26.615,-13.969 68.215,-13.969 9.826,-12.572 11.096,-12.572 51.426,-12.572 52.696,-12.572 37.766,-12.064 43.456,-12.064 79.366,-12.064 85.056,-12.064 19.986,-7.238 61.586,-7.238 29.816,-7.111 71.416,-7.111 37.766,-3.936 43.456,-3.936 79.366,-3.936 85.056,-3.936 9.826,-3.428 11.096,-3.428 51.426,-3.428 52.696,-3.428 18.843,-1.015 22.272,-1.015 60.443,-1.015 63.872,-1.015
  other v2: 45.18,-81.025 46.42,-81.025 45.18,-80.275 46.42,-80.275 45.18,-79.525 46.42,-79.525 45.18,-78.775 46.42,-78.775 45.18,-78.025 46.42,-78.025 45.18,-77.275 46.42,-77.275 45.18,-76.525 46.42,-76.525 45.18,-75.775 46.42,-75.775 22.375,-70.22 23.125,-70.22 23.875,-70.22 24.625,-70.22 25.375,-70.22 26.125,-70.22 26.875,-70.22 27.625,-70.22 63.975,-70.22 64.725,-70.22 65.475,-70.22 66.225,-70.22 66.975,-70.22 67.725,-70.22 68.475,-70.22 69.225,-70.22 22.375,-68.98 23.125,-68.98 23.875,-68.98 24.625,-68.98 25.375,-68.98 26.125,-68.98 26.875,-68.98 27.625,-68.98 63.975,-68.98 64.725,-68.98 65.475,-68.98 66.225,-68.98 66.975,-68.98 67.725,-68.98 68.475,-68.98 69.225,-68.98 45.18,-63.425 46.42,-63.425 45.18,-62.675 46.42,-62.675 45.18,-61.925 46.42,-61.925 45.18,-61.175 46.42,-61.175 45.18,-60.425 46.42,-60.425 45.18,-59.675 46.42,-59.675 45.18,-58.925 46.42,-58.925 45.18,-58.175 46.42,-58.175 22.375,-52.62 23.125,-52.62 23.875,-52.62 24.625,-52.62 25.375,-52.62 26.125,-52.62 26.875,-52.62 27.625,-52.62 63.975,-52.62 64.725,-52.62 65.475,-52.62 66.225,-52.62 66.975,-52.62 67.725,-52.62 68.475,-52.62 69.225,-52.62 22.375,-51.38 23.125,-51.38 23.875,-51.38 24.625,-51.38 25.375,-51.38 26.125,-51.38 26.875,-51.38 27.625,-51.38 63.975,-51.38 64.725,-51.38 65.475,-51.38 66.225,-51.38 66.975,-51.38 67.725,-51.38 68.475,-51.38 69.225,-51.38 45.18,-45.825 46.42,-45.825 45.18,-45.075 46.42,-45.075 45.18,-44.325 46.42,-44.325 45.18,-43.575 46.42,-43.575 45.18,-42.825 46.42,-42.825 45.18,-42.075 46.42,-42.075 45.18,-41.325 46.42,-41.325 45.18,-40.575 46.42,-40.575 22.375,-35.02 23.125,-35.02 23.875,-35.02 24.625,-35.02 25.375,-35.02 26.125,-35.02 26.875,-35.02 27.625,-35.02 63.975,-35.02 64.725,-35.02 65.475,-35.02 66.225,-35.02 66.975,-35.02 67.725,-35.02 68.475,-35.02 69.225,-35.02 22.375,-33.78 23.125,-33.78 23.875,-33.78 24.625,-33.78 25.375,-33.78 26.125,-33.78 26.875,-33.78 27.625,-33.78 63.975,-33.78 64.725,-33.78 65.475,-33.78 66.225,-33.78 66.975,-33.78 67.725,-33.78 68.475,-33.78 69.225,-33.78 45.18,-28.225 46.42,-28.225 45.18,-27.475 46.42,-27.475 45.18,-26.725 46.42,-26.725 45.18,-25.975 46.42,-25.975 45.18,-25.225 46.42,-25.225 45.18,-24.475 46.42,-24.475 45.18,-23.725 46.42,-23.725 45.18,-22.975 46.42,-22.975 22.375,-17.42 23.125,-17.42 23.875,-17.42 24.625,-17.42 25.375,-17.42 26.125,-17.42 26.875,-17.42 27.625,-17.42 63.975,-17.42 64.725,-17.42 65.475,-17.42 66.225,-17.42 66.975,-17.42 67.725,-17.42 68.475,-17.42 69.225,-17.42 22.375,-16.18 23.125,-16.18 23.875,-16.18 24.625,-16.18 25.375,-16.18 26.125,-16.18 26.875,-16.18 27.625,-16.18 63.975,-16.18 64.725,-16.18 65.475,-16.18 66.225,-16.18 66.975,-16.18 67.725,-16.18 68.475,-16.18 69.225,-16.18 45.18,-10.625 46.42,-10.625 45.18,-9.875 46.42,-9.875 45.18,-9.125 46.42,-9.125 45.18,-8.375 46.42,-8.375 45.18,-7.625 46.42,-7.625 45.18,-6.875 46.42,-6.875 45.18,-6.125 46.42,-6.125 45.18,-5.375 46.42,-5.375

## Polygon pours and split planes (outlines as drawn)
no net on Top Layer "Top" (solid, remove dead copper, pour order 56): 6,-16 cw(c6,-15) 5,-15 5,-1 cw(c6,-1) 6,0 9,-0.001 9,0 ccw(c10,0) 11,0 11,-0.001 39,0 ccw(c40,0) 41,0 44,0 cw(c44,-1) 45,-1 45,-15 cw(c44,-15) 44,-16 41,-15.999 41,-16 ccw(c40,-16) 39,-16 39,-15.999 11,-15.999 11,-16 ccw(c10,-16) 9,-16 9,-15.999
no net on Top Layer "Top" (solid, remove dead copper, pour order 60): 47.6,-16 cw(c47.6,-15) 46.6,-15 46.6,-1 cw(c47.6,-1) 47.6,0 50.6,-0.001 50.6,0 ccw(c51.6,0) 52.6,0 52.6,-0.001 80.6,0 ccw(c81.6,0) 82.6,0 85.6,0 cw(c85.6,-1) 86.6,-1 86.6,-15 cw(c85.6,-15) 85.6,-16 82.6,-15.999 82.6,-16 ccw(c81.6,-16) 80.6,-16 80.6,-15.999 52.6,-15.999 52.6,-16 ccw(c51.6,-16) 50.6,-16 50.6,-15.999
no net on Top Layer "Top" (solid, remove dead copper, pour order 64): 6,-33.6 cw(c6,-32.6) 5,-32.6 5,-18.6 cw(c6,-18.6) 6,-17.6 9,-17.601 9,-17.6 ccw(c10,-17.6) 11,-17.6 11,-17.601 39,-17.6 ccw(c40,-17.6) 41,-17.6 44,-17.6 cw(c44,-18.6) 45,-18.6 45,-32.6 cw(c44,-32.6) 44,-33.6 41,-33.599 41,-33.6 ccw(c40,-33.6) 39,-33.6 39,-33.599 11,-33.599 11,-33.6 ccw(c10,-33.6) 9,-33.6 9,-33.599
no net on Top Layer "Top" (solid, remove dead copper, pour order 68): 47.6,-33.6 cw(c47.6,-32.6) 46.6,-32.6 46.6,-18.6 cw(c47.6,-18.6) 47.6,-17.6 50.6,-17.601 50.6,-17.6 ccw(c51.6,-17.6) 52.6,-17.6 52.6,-17.601 80.6,-17.6 ccw(c81.6,-17.6) 82.6,-17.6 85.6,-17.6 cw(c85.6,-18.6) 86.6,-18.6 86.6,-32.6 cw(c85.6,-32.6) 85.6,-33.6 82.6,-33.599 82.6,-33.6 ccw(c81.6,-33.6) 80.6,-33.6 80.6,-33.599 52.6,-33.599 52.6,-33.6 ccw(c51.6,-33.6) 50.6,-33.6 50.6,-33.599
no net on Top Layer "Top" (solid, remove dead copper, pour order 72): 6,-51.2 cw(c6,-50.2) 5,-50.2 5,-36.2 cw(c6,-36.2) 6,-35.2 9,-35.201 9,-35.2 ccw(c10,-35.2) 11,-35.2 11,-35.201 39,-35.2 ccw(c40,-35.2) 41,-35.2 44,-35.2 cw(c44,-36.2) 45,-36.2 45,-50.2 cw(c44,-50.2) 44,-51.2 41,-51.199 41,-51.2 ccw(c40,-51.2) 39,-51.2 39,-51.199 11,-51.199 11,-51.2 ccw(c10,-51.2) 9,-51.2 9,-51.199
no net on Top Layer "Top" (solid, remove dead copper, pour order 76): 47.6,-51.2 cw(c47.6,-50.2) 46.6,-50.2 46.6,-36.2 cw(c47.6,-36.2) 47.6,-35.2 50.6,-35.201 50.6,-35.2 ccw(c51.6,-35.2) 52.6,-35.2 52.6,-35.201 80.6,-35.2 ccw(c81.6,-35.2) 82.6,-35.2 85.6,-35.2 cw(c85.6,-36.2) 86.6,-36.2 86.6,-50.2 cw(c85.6,-50.2) 85.6,-51.2 82.6,-51.199 82.6,-51.2 ccw(c81.6,-51.2) 80.6,-51.2 80.6,-51.199 52.6,-51.199 52.6,-51.2 ccw(c51.6,-51.2) 50.6,-51.2 50.6,-51.199
no net on Top Layer "Top" (solid, remove dead copper, pour order 80): 6,-68.8 cw(c6,-67.8) 5,-67.8 5,-53.8 cw(c6,-53.8) 6,-52.8 9,-52.801 9,-52.8 ccw(c10,-52.8) 11,-52.8 11,-52.801 39,-52.8 ccw(c40,-52.8) 41,-52.8 44,-52.8 cw(c44,-53.8) 45,-53.8 45,-67.8 cw(c44,-67.8) 44,-68.8 41,-68.799 41,-68.8 ccw(c40,-68.8) 39,-68.8 39,-68.799 11,-68.799 11,-68.8 ccw(c10,-68.8) 9,-68.8 9,-68.799
no net on Top Layer "Top" (solid, remove dead copper, pour order 84): 47.6,-68.8 cw(c47.6,-67.8) 46.6,-67.8 46.6,-53.8 cw(c47.6,-53.8) 47.6,-52.8 50.6,-52.801 50.6,-52.8 ccw(c51.6,-52.8) 52.6,-52.8 52.6,-52.801 80.6,-52.8 ccw(c81.6,-52.8) 82.6,-52.8 85.6,-52.8 cw(c85.6,-53.8) 86.6,-53.8 86.6,-67.8 cw(c85.6,-67.8) 85.6,-68.8 82.6,-68.799 82.6,-68.8 ccw(c81.6,-68.8) 80.6,-68.8 80.6,-68.799 52.6,-68.799 52.6,-68.8 ccw(c51.6,-68.8) 50.6,-68.8 50.6,-68.799
no net on Top Layer "Top" (solid, remove dead copper, pour order 88): 6,-86.4 cw(c6,-85.4) 5,-85.4 5,-71.4 cw(c6,-71.4) 6,-70.4 9,-70.401 9,-70.4 ccw(c10,-70.4) 11,-70.4 11,-70.401 39,-70.4 ccw(c40,-70.4) 41,-70.4 44,-70.4 cw(c44,-71.4) 45,-71.4 45,-85.4 cw(c44,-85.4) 44,-86.4 41,-86.399 41,-86.4 ccw(c40,-86.4) 39,-86.4 39,-86.399 11,-86.399 11,-86.4 ccw(c10,-86.4) 9,-86.4 9,-86.399
no net on Top Layer "Top" (solid, remove dead copper, pour order 92): 47.6,-86.4 cw(c47.6,-85.4) 46.6,-85.4 46.6,-71.4 cw(c47.6,-71.4) 47.6,-70.4 50.6,-70.401 50.6,-70.4 ccw(c51.6,-70.4) 52.6,-70.4 52.6,-70.401 80.6,-70.4 ccw(c81.6,-70.4) 82.6,-70.4 85.6,-70.4 cw(c85.6,-71.4) 86.6,-71.4 86.6,-85.4 cw(c85.6,-85.4) 85.6,-86.4 82.6,-86.399 82.6,-86.4 ccw(c81.6,-86.4) 80.6,-86.4 80.6,-86.399 52.6,-86.399 52.6,-86.4 ccw(c51.6,-86.4) 50.6,-86.4 50.6,-86.399
no net on Bottom Layer "Bottom" (solid, remove dead copper, pour order 58): 6,-16 cw(c6,-15) 5,-15 5,-1 cw(c6,-1) 6,0 9,-0.001 9,0 ccw(c10,0) 11,0 11,-0.001 39,0 ccw(c40,0) 41,0 44,0 cw(c44,-1) 45,-1 45,-15 cw(c44,-15) 44,-16 41,-15.999 41,-16 ccw(c40,-16) 39,-16 39,-15.999 11,-15.999 11,-16 ccw(c10,-16) 9,-16 9,-15.999
no net on Bottom Layer "Bottom" (solid, remove dead copper, pour order 62): 47.6,-16 cw(c47.6,-15) 46.6,-15 46.6,-1 cw(c47.6,-1) 47.6,0 50.6,-0.001 50.6,0 ccw(c51.6,0) 52.6,0 52.6,-0.001 80.6,0 ccw(c81.6,0) 82.6,0 85.6,0 cw(c85.6,-1) 86.6,-1 86.6,-15 cw(c85.6,-15) 85.6,-16 82.6,-15.999 82.6,-16 ccw(c81.6,-16) 80.6,-16 80.6,-15.999 52.6,-15.999 52.6,-16 ccw(c51.6,-16) 50.6,-16 50.6,-15.999
no net on Bottom Layer "Bottom" (solid, remove dead copper, pour order 66): 6,-33.6 cw(c6,-32.6) 5,-32.6 5,-18.6 cw(c6,-18.6) 6,-17.6 9,-17.601 9,-17.6 ccw(c10,-17.6) 11,-17.6 11,-17.601 39,-17.6 ccw(c40,-17.6) 41,-17.6 44,-17.6 cw(c44,-18.6) 45,-18.6 45,-32.6 cw(c44,-32.6) 44,-33.6 41,-33.599 41,-33.6 ccw(c40,-33.6) 39,-33.6 39,-33.599 11,-33.599 11,-33.6 ccw(c10,-33.6) 9,-33.6 9,-33.599
no net on Bottom Layer "Bottom" (solid, remove dead copper, pour order 70): 47.6,-33.6 cw(c47.6,-32.6) 46.6,-32.6 46.6,-18.6 cw(c47.6,-18.6) 47.6,-17.6 50.6,-17.601 50.6,-17.6 ccw(c51.6,-17.6) 52.6,-17.6 52.6,-17.601 80.6,-17.6 ccw(c81.6,-17.6) 82.6,-17.6 85.6,-17.6 cw(c85.6,-18.6) 86.6,-18.6 86.6,-32.6 cw(c85.6,-32.6) 85.6,-33.6 82.6,-33.599 82.6,-33.6 ccw(c81.6,-33.6) 80.6,-33.6 80.6,-33.599 52.6,-33.599 52.6,-33.6 ccw(c51.6,-33.6) 50.6,-33.6 50.6,-33.599
no net on Bottom Layer "Bottom" (solid, remove dead copper, pour order 74): 6,-51.2 cw(c6,-50.2) 5,-50.2 5,-36.2 cw(c6,-36.2) 6,-35.2 9,-35.201 9,-35.2 ccw(c10,-35.2) 11,-35.2 11,-35.201 39,-35.2 ccw(c40,-35.2) 41,-35.2 44,-35.2 cw(c44,-36.2) 45,-36.2 45,-50.2 cw(c44,-50.2) 44,-51.2 41,-51.199 41,-51.2 ccw(c40,-51.2) 39,-51.2 39,-51.199 11,-51.199 11,-51.2 ccw(c10,-51.2) 9,-51.2 9,-51.199
no net on Bottom Layer "Bottom" (solid, remove dead copper, pour order 78): 47.6,-51.2 cw(c47.6,-50.2) 46.6,-50.2 46.6,-36.2 cw(c47.6,-36.2) 47.6,-35.2 50.6,-35.201 50.6,-35.2 ccw(c51.6,-35.2) 52.6,-35.2 52.6,-35.201 80.6,-35.2 ccw(c81.6,-35.2) 82.6,-35.2 85.6,-35.2 cw(c85.6,-36.2) 86.6,-36.2 86.6,-50.2 cw(c85.6,-50.2) 85.6,-51.2 82.6,-51.199 82.6,-51.2 ccw(c81.6,-51.2) 80.6,-51.2 80.6,-51.199 52.6,-51.199 52.6,-51.2 ccw(c51.6,-51.2) 50.6,-51.2 50.6,-51.199
no net on Bottom Layer "Bottom" (solid, remove dead copper, pour order 82): 6,-68.8 cw(c6,-67.8) 5,-67.8 5,-53.8 cw(c6,-53.8) 6,-52.8 9,-52.801 9,-52.8 ccw(c10,-52.8) 11,-52.8 11,-52.801 39,-52.8 ccw(c40,-52.8) 41,-52.8 44,-52.8 cw(c44,-53.8) 45,-53.8 45,-67.8 cw(c44,-67.8) 44,-68.8 41,-68.799 41,-68.8 ccw(c40,-68.8) 39,-68.8 39,-68.799 11,-68.799 11,-68.8 ccw(c10,-68.8) 9,-68.8 9,-68.799